# Altium PCB STM32F103.PcbDoc (part 4 of 5)
Units mil, origin at the board's own origin, x right, y up, seen from the top; angles counter-clockwise.
Board outline 3951 x 3526 mil, 2 copper layers (Top Layer, Bottom Layer); 148 components, 169 nets, 748 pads, 448 vias.
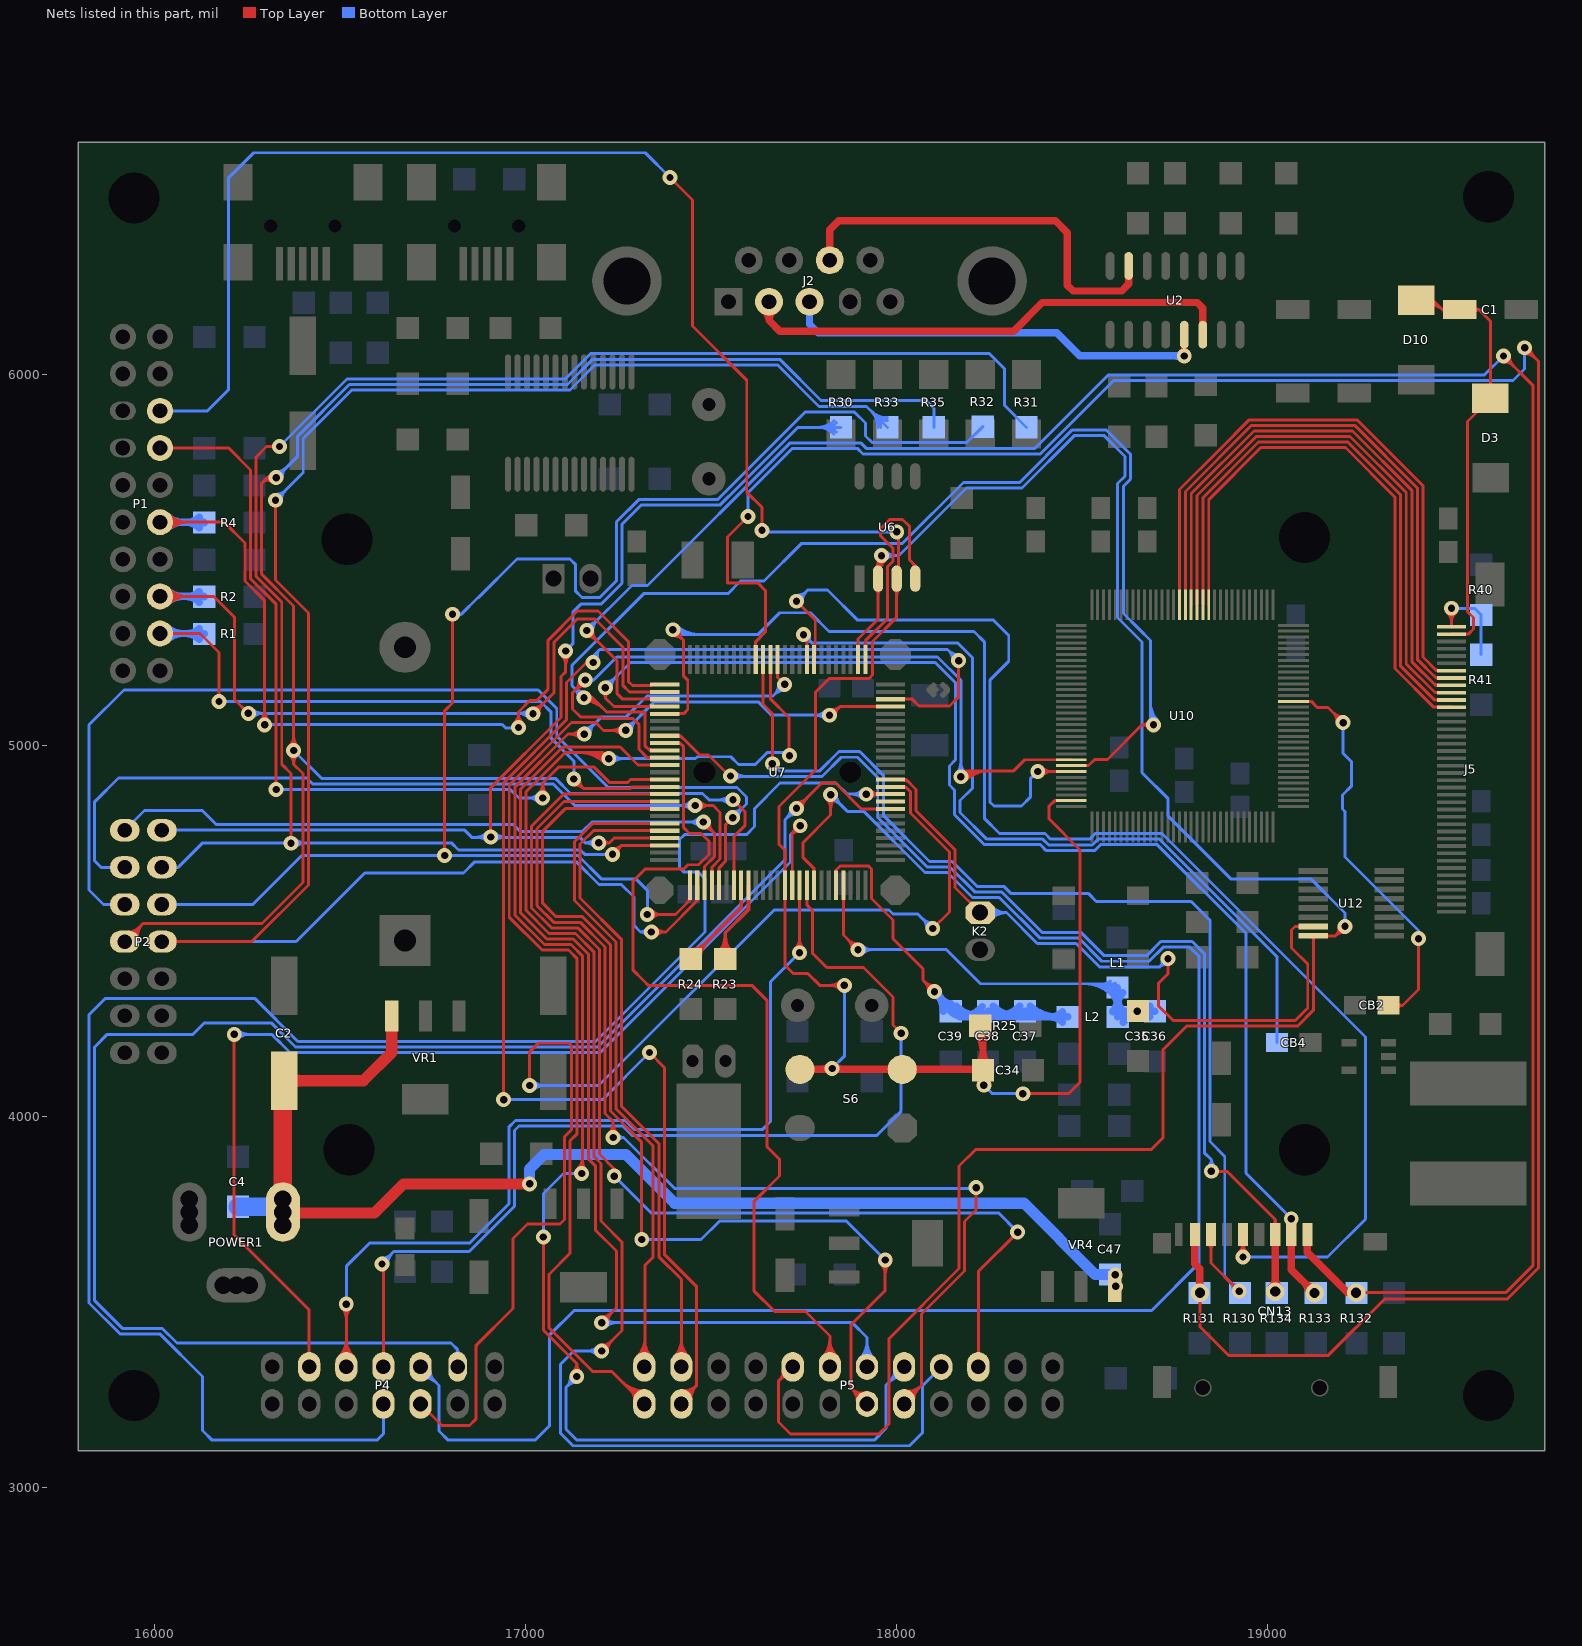
[diagram p4: the nets of this part, all layers, seen from the top]

## Via types
v1: diameter 40, hole 19.68, Top Layer to Bottom Layer, 402 vias
v2: diameter 35, hole 19.68, Top Layer to Bottom Layer, 21 vias
v3: diameter 50, hole 27.56, Top Layer to Bottom Layer, 19 vias
v4: diameter 40, hole 20, Top Layer to Bottom Layer, 6 vias

## Nets (pads, with @x,y where several pads share a name; then routed paths per layer and width w, separated by ;. In a path a pad name is that pad's centre, name@x,y a point inside that pad or via, vN(x,y) a via of type N, cw(c..) or ccw(c..) an arc to the next point about the centre after c; other vN are vias at no path point) (continued)
PA14: P1.9 R4.1 U7.76 | length 2912
  Top Layer w8: P1.9@16015,5602 16188,5602 16244,5546 16244,5443.38 16297,5390.38 v1(16297,5056) ; P1.9@16025.61,5591.39 cw(c16051.21,5565.79) 16051.21,5602 cw(c16051.21,5638.21) P1.9@16025.61,5612.61 ; P1.9@16031.26,5585.74 cw(c16070.53,5546.47) 16070.53,5602 cw(c16070.53,5657.53) P1.9@16031.26,5618.26 ; P1.9@16036.92,5580.08 cw(c16089.84,5527.16) 16089.84,5602 cw(c16089.84,5676.84) P1.9@16036.92,5623.92 ; v1@16285.69,5067.31 ccw(c16258.37,5094.63) 16297,5094.63 ccw(c16335.63,5094.63) v1@16308.31,5067.31 ; v1@16969.69,5060.31 ccw(c16942.37,5087.63) 16981,5087.63 ccw(c17019.63,5087.63) v1@16992.31,5060.31 ; v1(16981,5049) 16981,5090.84 17012.16,5122 17031,5122 17061,5152 17061,5284.21 17139.52,5362.73 17195,5362.73 17277,5280.73 17277,5173 17288,5162 17339,5162 17339,5164.35 U7.76@17375.09,5164.35 ; 17331.91,5162 ccw(c17331.91,5173.66) U7.76@17340.16,5165.41
  Bottom Layer w8: v1(16297,5056) 16298,5057 16937.04,5057 16946.04,5048 16982,5048 v1(16981,5049)
  Bottom Layer w20: P1.9@16015,5602 16133.5,5602 R4.1@16134.5,5601 ; P1.9@16032.68,5584.32 cw(c16075.36,5541.64) 16075.36,5602 cw(c16075.36,5662.36) P1.9@16032.68,5619.68 ; 16083.8,5602 cw(c16083.8,5550.3) R4.1@16120.36,5586.86 ; 16088.63,5602 ccw(c16088.63,5646.87) R4.1@16120.36,5615.14
PA15: P1.5 R2.1 U7.77 | length 2700.3
  Top Layer w8: P1.5@16015,5402 16160,5402 16216,5346 16216,5124 v1(16253,5087) ; P1.5@16025.61,5391.39 cw(c16051.21,5365.79) 16051.21,5402 cw(c16051.21,5438.21) P1.5@16025.61,5412.61 ; P1.5@16031.26,5385.74 cw(c16070.53,5346.47) 16070.53,5402 cw(c16070.53,5457.53) P1.5@16031.26,5418.26 ; P1.5@16036.92,5380.08 cw(c16089.84,5327.16) 16089.84,5402 cw(c16089.84,5476.84) P1.5@16036.92,5423.92 ; v1(17020,5086) 17077,5143 17077,5279 17139,5341 17187,5341 17262,5266 17262,5162.67 17280,5144.67 U7.77@17375.09,5144.67 ; v1@17020,5102 ccw(c17020,5140.63) 17047.31,5113.31 ccw(c17074.63,5086) v1@17036,5086
  Bottom Layer w8: v1(16253,5087) 17019,5087 v1(17020,5086) ; v1@16264.31,5075.69 cw(c16291.63,5048.37) 16291.63,5087 cw(c16291.63,5125.63) v1@16264.31,5098.31 ; 16978.96,5087 cw(c16978.96,5044.96) v1@17008.69,5074.69 ; 16983.79,5087 ccw(c16983.79,5122.21) v1@17008.69,5097.31 ; 16998.27,5087 cw(c16998.27,5064.27) v1@17014.34,5080.34
  Bottom Layer w20: P1.5@16015,5402 16133.5,5402 R2.1@16134.5,5401 ; P1.5@16032.68,5384.32 cw(c16075.36,5341.64) 16075.36,5402 cw(c16075.36,5462.36) P1.5@16032.68,5419.68 ; 16083.8,5402 cw(c16083.8,5350.3) R2.1@16120.36,5386.86 ; 16088.63,5402 ccw(c16088.63,5446.87) R2.1@16120.36,5415.14
PB0: P4.7 U7.35 | length 4835.9
  Top Layer w8: v1(17917.92,4869.08) U7.35@17983.35,4869.08 ; v1@17929.24,4857.76 cw(c17956.55,4830.45) 17956.55,4869.08 cw(c17956.55,4907.71) v1@17929.24,4880.39
  Bottom Layer w8: P4.7@16617,3226 16617,3146 16599.5,3128.5 16155.71,3128.5 16129.34,3154.88 16129.34,3300.12 16014.46,3415 15907.21,3415 15824,3498.21 15824,4275 15868,4319 16270.21,4319 16386.21,4203 17188.51,4203 17483.25,4497.75 17483.25,4640.75 17464,4660 17426,4660 17415,4671 17415,4747 17428,4760 17595,4760 17617,4782 17617,4830.16 17685.84,4899 17836.63,4899 17866.55,4869.08 v1(17917.92,4869.08) ; v1@17906.61,4857.76 ccw(c17879.29,4830.45) 17879.29,4869.08 ccw(c17879.29,4907.71) v1@17906.61,4880.39
PB1: P4.9 U7.36 | length 3491.3
  Top Layer w8: P4.9@16714,3223 P4.9@16717,3226 16775,3168 16849,3168 16866,3185 16866,3380 16867.5,3381.5 ; 16866,3383 16966,3483 16966,3672 17005,3711 17093,3711 17105,3723 17105,3946.21 17124,3965.21 17124,4192 17118,4198 17034,4198 17011,4175 v1(17011,4084) ; U7.36@17983.35,4888.76 18024.09,4888.76 18037,4875.86 18037,4818.33 18142,4713.33 18142,4552 v1(18097,4507) ; U7.36@18017.77,4887.37 cw(c18021.09,4878.89) 18027.53,4885.33
  Bottom Layer w8: v1(17011,4084) 17196.79,4084 17669.79,4557 17979,4557 17990,4546 18057,4546 v1@18086,4517 ; v1@17022.31,4072.69 cw(c17049.63,4045.37) 17049.63,4084 cw(c17049.63,4122.63) v1@17022.31,4095.31 ; 18067.98,4535.02 ccw(c18097,4564.04) v1@18097,4523 ; 18070.39,4532.61 cw(c18044.79,4507) v1@18081,4507 ; 18081.64,4521.36 ccw(c18097,4536.73) v1@18097,4515
PB2: K2.1 U7.37 U12.15 | length 2169.5
  Top Layer w8: U7.37@17983.35,4908.45 18025.62,4908.45 18052,4882.07 18052,4824.54 18157,4719.54 18157,4618 K2.1@18225,4550 ; U7.37@18017.22,4906.95 cw(c18017.22,4883.05) 18034.12,4899.95 ; U7.37@18017.72,4907.03 cw(c18021.55,4895.97) 18029.82,4904.25 ; v1(18731,4426) 18731,4385 18705,4359 18705,4299 18745,4259 18848,4259 19073.79,4259 19107.64,4292.85 19107.64,4411.36 19064,4455 19064,4503.5 19073,4512.5 U12.15@19122.64,4512.5 ; U12.15@19088.4,4509.76 ccw(c19081.79,4503.15) 19081.79,4512.5 ccw(c19081.79,4521.85) U12.15@19088.4,4515.24
  Bottom Layer w8: K2.1@18225,4550 18296,4550 ; K2.1@18247.99,4537.54 cw(c18277.23,4509.46) 18277.23,4550 cw(c18277.23,4590.54) K2.1@18247.99,4562.46 ; K2.1@18253.76,4532 cw(c18296,4491.45) 18296,4550 ; K2.1@18253.76,4568 ccw(c18296,4608.55) 18296,4550 ; v1@18715.22,4423.38 cw(c18693.27,4419.73) 18709,4404 ; v1@18728.38,4410.22 ccw(c18724.73,4388.27) 18709,4404 ; v1(18731,4426) 18709,4404 ; 18296,4550 18379,4467 18483.56,4467 18546.56,4404 18709,4404
PB3: P1.13 U7.89 | length 2415.8
  Top Layer w8: P1.13@16015,5802 16200,5802 16259,5743 16259,5449.59 16328,5380.59 v1(16328,4882) ; v1@17034.69,4870.31 ccw(c17007.37,4897.63) 17046,4897.63 ccw(c17084.63,4897.63) v1@17057.31,4870.31 ; v1@17047,4859 v1(17046,4859) 17046,4899.2 17088.8,4942 17185,4942 17227,4900 17274.55,4900 17283,4908.45 U7.89@17375.09,4908.45
  Bottom Layer w8: v1(16328,4882) 16959,4882 16982,4859 v1(17046,4859) ; v1@17034.69,4847.69 ccw(c17007.37,4820.37) 17007.37,4859 ccw(c17007.37,4897.63) v1@17034.69,4870.31
PB4: P1.3 R1.1 U7.90 | length 2027
  Top Layer w8: P1.3@16015,5302 16123,5302 16174.21,5250.79 v1(16174.21,5118.79) ; v1(17130,4910) 17155.51,4884.49 ; v1@17130.79,4894.02 cw(c17132.4,4861.38) 17155.51,4884.49 ; v1@17145.98,4909.21 ccw(c17178.62,4907.6) 17155.51,4884.49 ; U7.90@17375.09,4888.76 17286.85,4888.76 17282.57,4884.49 17155.51,4884.49
  Bottom Layer w8: v1(16174.21,5118.79) 17040.21,5118.79 17069,5090 17069,5019.57 17130,4958.57 v1(17130,4910)
  Bottom Layer w20: P1.3@16015,5302 16133.5,5302 R1.1@16134.5,5301 ; P1.3@16032.68,5284.32 cw(c16075.36,5241.64) 16075.36,5302 cw(c16075.36,5362.36) P1.3@16032.68,5319.68 ; 16083.8,5302 cw(c16083.8,5250.3) R1.1@16120.36,5286.86 ; 16088.63,5302 ccw(c16088.63,5346.87) R1.1@16120.36,5315.14
PB5: P5.20 U7.91 | length 3028.3
  Top Layer w8: v1(17239,3840) 17239,3859.43 17199,3899.43 17199,4450.85 17140.85,4509 17069.57,4509 17016,4562.57 17016,4783 17102.08,4869.08 U7.91@17375.09,4869.08 ; P5.20@18220,3326 18220,3583 v1(18326,3689)
  Bottom Layer w8: v1(17239,3840) 17338,3741 18274,3741 v1(18326,3689)
PB6: P5.15 U7.92 | length 3294.1
  Top Layer w8: v1@17224.69,3955.31 ccw(c17197.37,3982.63) 17236,3982.63 ccw(c17274.63,3982.63) v1@17247.31,3955.31 ; v1(17236,3944) 17236,3987 17214,4009 17214,4457.07 17147.07,4524 17075.79,4524 17031,4568.79 17031,4776.79 17103.61,4849.39 U7.92@17375.09,4849.39 ; P5.15@18020,3226 18020,3229 18067,3276 ; P5.15@18021.46,3245.89 ccw(c18025.42,3272.61) 18044.51,3253.51 ; P5.15@18022.63,3253.81 ccw(c18028.31,3292.19) 18055.75,3264.75 ; P5.15@18023.81,3261.72 ccw(c18031.21,3311.78) 18067,3276 ; P5.15@18038,3236 cw(c18064.56,3236) 18045.78,3254.78 ; P5.15@18046,3236 cw(c18091.87,3236) 18059.44,3268.44 ; v1(18214,3809) 18214,3749 18183,3718 18183,3584.57 18067,3468.57 18067,3276
  Bottom Layer w8: v1(17236,3944) 17264,3944 ; v1@17249.78,3935.88 cw(c17264,3927.5) 17264,3944 ; v1@17249.78,3952.12 ccw(c17264,3960.5) 17264,3944 ; v1(18214,3809) 18214,3807 17401,3807 17264,3944
PB7: P5.13 U7.93 | length 2961.1
  Top Layer w8: v1(17313,3669) 17313,3931.21 17229,4015.21 17229,4463.28 17153.28,4539 17082,4539 17046,4575 17046,4769 17107,4830 17374.79,4830 U7.93@17375.09,4829.71 ; 17889.79,3256.21 ccw(c17909.88,3276.3) P5.13@17916.08,3248.57 ; 17893.03,3252.97 cw(c17871.38,3231.32) P5.13@17902,3231.12 ; P5.13@17894,3231.17 ccw(c17844.5,3231.49) 17879.5,3266.5 ccw(c17906.13,3293.12) P5.13@17914.33,3256.38 ; P5.13@17920,3226 17877,3269 17877,3439.79 17969,3531.79 v1(17969,3614) ; v1@17957.69,3602.69 cw(c17930.37,3575.37) 17969,3575.37 cw(c18007.63,3575.37) v1@17980.31,3602.69
  Bottom Layer w8: v1(17313,3669) 17473,3669 17522.5,3718.5 17864.5,3718.5 v1(17969,3614)
PB8: P5.2 U7.95 | length 1943.1
  Top Layer w8: P5.2@17301.62,3354.38 ccw(c17252.4,3403.6) 17322,3403.6 ; P5.2@17307.27,3348.73 ccw(c17271.72,3384.28) 17322,3384.28 ; P5.2@17320,3326 17322,3328 17322,3600 17344,3622 17344,3921.43 17244,4021.43 17244,4471 17132,4583 17132,4741 17181.34,4790.34 U7.95@17375.09,4790.34 ; 17322,3374.63 ccw(c17358.63,3374.63) P5.2@17332.73,3348.73 ; 17322,3393.94 ccw(c17377.94,3393.94) P5.2@17338.38,3354.38
PB9: P5.4 U7.96 | length 1931.7
  Top Layer w8: U7.96@17375.09,4770.65 17182.87,4770.65 17147,4734.79 17147,4589.21 17259,4477.21 17259,4027.64 17359,3927.64 17359,3623 17420,3562 P5.4@17420,3326 ; P5.4@17401.62,3354.38 ccw(c17357.23,3398.77) 17420,3398.77 ccw(c17482.77,3398.77) P5.4@17438.38,3354.38 ; P5.4@17407.27,3348.73 ccw(c17376.54,3379.46) 17420,3379.46 ccw(c17463.46,3379.46) P5.4@17432.73,3348.73
PB10: P5.1 U7.47 | length 3553.4
  Top Layer w8: 17258.54,3287.46 ccw(c17320,3348.91) P5.1@17320,3262 ; v1@17258.69,5029.69 ccw(c17231.37,5002.37) 17231.37,5041 ccw(c17231.37,5079.63) v1@17258.69,5052.31 ; v1(17270,5041) 17210,5041 17189,5062 17123.94,5062 16956,4894.06 16956,4537.72 17044.72,4449 17116,4449 17139,4426 17139,3954.21 17120,3935.21 17120,3632 17063,3575 17063,3431.21 17180.11,3314.11 17231.89,3314.11 P5.1@17320,3226 ; 17272.2,3273.8 ccw(c17320,3321.6) P5.1@17320,3254 ; 17282.69,3263.31 cw(c17255.37,3236) P5.1@17294,3236 ; 17285.86,3260.14 ccw(c17320,3294.28) P5.1@17320,3246 ; v1(17819,5082) 17824,5082 17847.3,5105.3 ; v1@17820.57,5089.84 ccw(c17824.09,5107.38) 17836.73,5094.73 ; v1@17822.14,5097.69 ccw(c17827.61,5124.98) 17847.3,5105.3 ; v1@17835,5082 cw(c17861.56,5082) 17842.78,5100.78 ; U7.47@17983.35,5105.3 17847.3,5105.3
  Bottom Layer w8: v1(17270,5041) 17347,5118 17627.21,5118 17663.21,5082 v1(17819,5082) ; v1@17270,5057 ccw(c17270,5095.63) 17297.31,5068.31 ccw(c17324.63,5041) v1@17286,5041 ; v1@17807.69,5070.69 ccw(c17780.37,5043.37) 17780.37,5082 ccw(c17780.37,5120.63) v1@17807.69,5093.31
PB11: P5.3 U7.48 | length 4355.6
  Top Layer w8: v1(16941,4046) 16941,4900.27 17110.2,5069.47 17110.2,5170.2 17164,5224 v1(17182,5224) ; v1(17334,4173) 17374,4133 17374,3629.21 17461,3542.21 17461,3276 ; P5.3@17420,3226 17420,3235 17461,3276 ; P5.3@17421.57,3253.93 ccw(c17424.57,3288.17) 17448.87,3263.87 ; P5.3@17422.27,3261.9 ccw(c17426.52,3310.48) 17461,3276 ; P5.3@17437.98,3236.83 cw(c17472.92,3238.45) 17448.19,3263.19 ; P5.3@17445.97,3237.2 cw(c17497.41,3239.59) 17461,3276 ; U7.48@17983.35,5124.98 18042,5124.98 18059.98,5107 18142,5107 18167,5132 18167,5164 v1(18167,5229)
  Bottom Layer w8: v1@16943,4044 v1(16941,4046) 17207,4046 v1(17334,4173) ; 17184.87,5243.87 ccw(c17196.72,5232.02) v1(17182,5224) 17182,5241 17200,5259 ; v1@17189.03,5227.83 cw(c17206.52,5237.35) 17192.43,5251.43 ; v1@17196.05,5231.65 cw(c17216.31,5242.69) 17200,5259 ; v1@18151,5229 ccw(c18112.37,5229) 18139.69,5256.31 ccw(c18167,5283.63) v1@18167,5245 ; v1(18167,5229) 18137,5259 17200,5259
PB12: U6.4 U7.51 | length 666.4
  Top Layer w8: U7.51@17915.44,5232.27 17915.44,5282.44 17975,5342 17975,5482 17990,5497 17990,5532 17955.79,5566.21 17955.79,5584 17981.29,5609.5 18016,5609.5 18035,5590.5 18035,5500 18050,5485 U6.4@18050,5450 ; 18040.13,5494.87 cw(c18020.16,5474.91) U6.4@18048.23,5471.84
PB13: P5.10 U6.2 U7.52 U12.16 | length 5996.3
  Top Layer w8: 17682.69,3288.69 ccw(c17655.37,3316) P5.10@17694,3316 ; 17685.81,3291.81 cw(c17705.97,3271.65) P5.10@17714.57,3298.84 ; P5.10@17720,3326 17681.5,3287.5 17681.5,3177.5 17714,3145 17952,3145 17979,3172 17979,3401.79 18168,3590.79 18168,3867 18213,3912 18686,3912 18717,3943 18717,4180 18781,4244 19080,4244 19122.64,4286.64 U12.16@19122.64,4487.5 19182.5,4487.5 ; U7.52@17895.76,5232.27 17895.76,5287.07 17950,5341.31 U6.2@17950,5450 17950,5503 v1(17959,5512) ccw(c17980.73,5490.27) 17950,5490.27 ; U6.2@17943.08,5421.43 cw(c17926.39,5404.73) 17950,5404.73 cw(c17973.61,5404.73) U6.2@17956.92,5421.43 ; U6.2@17943.08,5478.57 ccw(c17926.39,5495.26) 17950,5495.26 ccw(c17973.61,5495.26) U6.2@17956.92,5478.57 ; U6.2@17950,5451.64 cw(c18019.36,5451.64) v1@17970.31,5500.69 ; U6.2@17950,5470.96 cw(c18000.04,5470.96) v1@17964.66,5506.34 ; U12.16@19119.9,4484.76 cw(c19113.29,4478.15) 19122.64,4478.15 cw(c19131.99,4478.15) U12.16@19125.38,4484.76 ; U12.16@19156.87,4484.76 cw(c19163.49,4478.15) 19163.49,4487.5 cw(c19163.49,4496.85) U12.16@19156.87,4490.24 ; v1@19192.02,4512.2 cw(c19159.42,4510.58) 19182.5,4487.5 ; v1@19207.2,4497.02 ccw(c19205.58,4464.42) 19182.5,4487.5 ; v1(19208,4513) 19182.5,4487.5
  Bottom Layer w8: v1(17959,5512) 18006,5512 18188,5694 18337.53,5694 18479.53,5836 18558,5836 18615,5779 18615,5726 18595,5706 18595,5345.07 18661,5279.07 18661,4927.05 18731.42,4856.63 18731.42,4809.86 18901.28,4640 19116.79,4640 19208,4548.79 v1(19208,4513) ; v1@17970.31,5500.69 cw(c17997.63,5473.37) 17997.63,5512 cw(c17997.63,5550.63) v1@17970.31,5523.31
PC0: P4.4 U7.15 | length 3091.1
  Top Layer w8: v1(16215,4222) 16215,3681 16417,3479 P4.4@16417,3326 ; U7.15@17718.59,4624 17718.59,4762.59 ; v1@17724.28,4781.03 cw(c17703.99,4777.19) 17718.59,4762.59 ; v1@17737.03,4768.28 ccw(c17733.19,4747.99) 17718.59,4762.59 ; v1(17740,4784) 17718.59,4762.59
  Bottom Layer w8: v1(16215,4222) 16316,4222 16365,4173 17200.93,4173 17714,4686.07 17714,4760 17738,4784 v1(17740,4784) ; v1@16226.31,4210.69 cw(c16253.63,4183.37) 16253.63,4222 cw(c16253.63,4260.63) v1@16226.31,4233.31
PC1: P4.6 U7.16 | length 2674.9
  Top Layer w8: P4.6@16498.62,3354.38 ccw(c16454.23,3398.77) 16517,3398.77 ccw(c16579.77,3398.77) P4.6@16535.38,3354.38 ; P4.6@16504.27,3348.73 ccw(c16473.54,3379.46) 16517,3379.46 ccw(c16560.46,3379.46) P4.6@16529.73,3348.73 ; v1@16505.69,3483.69 cw(c16478.37,3456.37) 16517,3456.37 cw(c16555.63,3456.37) v1@16528.31,3483.69 ; P4.6@16517,3326 v1(16517,3495) ; v1@17726.96,4453.04 ccw(c17699.65,4480.35) 17738.28,4480.35 ccw(c17776.9,4480.35) v1@17749.59,4453.04 ; v1(17738.28,4441.72) U7.16@17738.28,4624
  Bottom Layer w8: v1(16517,3495) 16517,3597 16580,3660 16849.79,3660 16955,3765.21 16955,3972 16973,3990 17268.21,3990 17293.21,3965 17637.79,3965 17660,3987.21 17660,4363.45 v1(17738.28,4441.72)
PC2: P4.8 U7.17 | length 2839.4
  Top Layer w8: v1(16613,3603) 16617,3599 P4.8@16617,3326 ; U7.17@17757.96,4624 17757.96,4571 17773.46,4555.5 17773.46,4440.33 17811.79,4402 17910.59,4402 17990,4322.59 17990,4247 v1(18012,4225)
  Bottom Layer w8: v1@16613,3605 16645,3637 16848,3637 16970,3759 16970,3963 16982,3975 17262,3975 17287,3950 17947,3950 18012,4015 v1(18012,4225) ; v1@16613,3619 ccw(c16613,3652.8) 16636.9,3628.9 ; v1@16621,3603 cw(c16645.14,3603) 16628.07,3620.07 ; v1@16629,3603 cw(c16672.46,3603) 16641.73,3633.73
PC3: P4.10 U7.18 | length 5139.7
  Top Layer w8: U7.18@17777.65,4624 17777.65,4668.35 17748,4698 17748,4739 17822,4813 v1(17822,4868) ; v1@17810.69,4856.69 cw(c17783.37,4829.37) 17822,4829.37 cw(c17860.63,4829.37) v1@17833.31,4856.69
  Bottom Layer w8: P4.10@16717,3326 16767,3276 16767,3153 16791.5,3128.5 17025.5,3128.5 17064,3167 17064,3411 17131,3478 18687,3478 18814,3605 18814,4433 18790,4457 18718,4457 18680,4419 18552.77,4419 18489.77,4482 18385.21,4482 18276.21,4591 18204,4591 18137,4658 18076,4658 17910.92,4823.08 17866.92,4823.08 v1(17822,4868) ; P4.10@16717.89,3306.04 cw(c16721.25,3268.64) 16747.81,3295.19 ; P4.10@16718.61,3298.07 cw(c16723.25,3246.44) 16759.9,3283.1 ; P4.10@16743,3316 ccw(c16781.63,3316) 16754.31,3288.69 ; v1@17822,4852 cw(c17822,4813.37) 17849.31,4840.69 cw(c17876.63,4868) v1@17838,4868
PC4: P4.12 U7.33 | length 4497.8
  Top Layer w8: v1(17730,4831) 17798,4899 17834.84,4899 17904.13,4829.71 U7.33@17983.35,4829.71 ; v1@17730,4847 ccw(c17730,4885.63) 17757.31,4858.31 ccw(c17784.63,4831) v1@17746,4831
  Bottom Layer w8: P4.12@16809.21,3360.5 ccw(c16804.62,3372) 16817,3372 ; P4.12@16817,3326 16817,3372 ; P4.12@16824.79,3360.5 cw(c16829.38,3372) 16817,3372 ; v1@17714,4831 cw(c17675.37,4831) 17702.69,4803.69 cw(c17730,4776.37) v1@17730,4815 ; v1(17730,4831) 17699,4800 17699,4692.28 17194.72,4188 16380,4188 16315,4253 16135,4253 16104,4222 15873,4222 15839,4188 15839,3504.43 15913.43,3430 16020.67,3430 16060.67,3390 16799,3390 16817,3372
PC5: U7.34
PC6: P5.16 U7.63 | length 4455.8
  Top Layer w8: v1(17048,3676) 17048,3425 17138,3335 ; v1@17127.53,3312.1 ccw(c17107.72,3335) 17138,3335 ; v1(17138,3300) 17138,3335 ; v1@17139.69,3858.31 ccw(c17105.13,3892.87) 17154,3892.87 ; v1@17145.34,3852.66 ccw(c17124.44,3873.56) 17154,3873.56 ; v1@17146.69,5019.69 ccw(c17119.37,4992.37) 17119.37,5031 ccw(c17119.37,5069.63) v1@17146.69,5042.31 ; v1@17148.47,3312.1 cw(c17168.28,3335) 17138,3335 ; v1@17151,3836 v1(17151,3847) 17154,3850 17154,4432.21 17122.21,4464 17050.93,4464 16971,4543.93 16971,4887.84 17114.16,5031 v1(17158,5031) ; 17154,3878.38 ccw(c17182.38,3878.38) v1@17162.31,3858.31 ; U7.63@17679.22,5232.27 17679.22,5183.78 v1(17698,5165)
  Bottom Layer w8: v1(17048,3676) 17048,3793 17102,3847 v1(17151,3847) ; v1@17122,3300 cw(c17083.37,3300) 17110.69,3272.69 cw(c17138,3245.37) v1@17138,3284 ; v1(17138,3300) 17109,3271 17109,3158 17138.5,3128.5 17939.5,3128.5 17971,3160 17971,3277 P5.16@18020,3326 ; v1(17158,5031) 17203.69,5076.69 17269.69,5076.69 17327,5134 17667,5134 v1(17698,5165) ; v1@17158,5047 ccw(c17158,5085.63) 17185.31,5058.31 ccw(c17212.63,5031) v1@17174,5031 ; v1@17682,5165 cw(c17643.37,5165) 17670.69,5137.69 cw(c17698,5110.37) v1@17698,5149 ; 17977.86,3283.86 cw(c18012.91,3248.8) P5.16@18018.11,3298.1 ; 17982.69,3288.69 ccw(c17955.37,3316) P5.16@17994,3316 ; 17989.71,3295.71 cw(c18015.17,3270.25) P5.16@18018.95,3306.06
PC7: P5.18 U7.64 | length 4646.9
  Top Layer w8: 17146.75,4981 cw(c17146.75,4887.75) v1@17212.69,4953.69 ; 17166.06,4981 cw(c17166.06,4907.06) v1@17218.34,4959.34 ; 17185.37,4981 cw(c17185.37,4926.37) v1(17224,4965) 17208,4981 17106.58,4981 17001,4875.42 17001,4556.36 17063.36,4494 17134.64,4494 17184,4444.64 17184,3893.21 17203,3874.21 17203,3719 17260,3662 17260,3424 v1(17205,3369) ; 17204.69,4981 cw(c17204.69,4945.69) v1@17229.66,4970.66 ; v1@17205,3385 ccw(c17205,3423.63) 17232.31,3396.31 ccw(c17259.63,3369) v1@17221,3369 ; U7.64@17659.54,5232.27 17659.54,5126 17710,5075.54 17710,4974 v1(17711,4973)
  Bottom Layer w8: v1@17193.69,3357.69 ccw(c17166.37,3330.37) 17166.37,3369 ccw(c17166.37,3407.63) v1@17193.69,3380.31 ; v1(17205,3369) 17130,3369 17094,3333 17094,3147 17127.5,3113.5 18034.5,3113.5 18070,3149 18070,3276 P5.18@18120,3326 ; v1(17224,4965) 17458,4965 17463,4970 17553,4970 17574,4949 17619.16,4949 17652.16,4982 17702,4982 v1(17711,4973) v1@17710,4972 ; v1@17235.31,4953.69 cw(c17262.63,4926.37) 17262.63,4965 cw(c17262.63,5003.63) v1@17235.31,4976.31
PC8: CN13.7 R130.2 U7.65 | length 3065.7
  Top Layer w8: U7.65@17639.85,5232.27 17639.85,5112 17665,5086.85 v1(17665,4951) ; CN13.7@18839.86,3658.06 cw(c18823.16,3641.37) 18846.77,3641.37 cw(c18870.38,3641.37) CN13.7@18853.69,3658.06 ; CN13.7@18846.77,3682.69 18846.77,3606.23 v1(18923,3530)
  Bottom Layer w8: v1(17665,4951) 17684,4932 17792.79,4932 17844.79,4984 17900.21,4984 17964,4920.21 17964,4812.43 18088.43,4688 18149.43,4688 18216.43,4621 18288.64,4621 18307.64,4602 18516,4602 18538,4580 18793.43,4580 18844,4529.43 18844,3933 18884,3893 18884,3569 v1(18923,3530) ; R130.2@18907,3530 ccw(c18868.37,3530) 18895.69,3557.31 ccw(c18923,3584.63) R130.2@18923,3546
PC9: CN13.8 R131.2 U7.66 | length 6779.5
  Top Layer w8: v1(17599.32,5617.16) 17544,5561.84 17544,5438.58 17625.42,5438.58 17646.17,5417.83 17646.17,5306 17620.17,5280 U7.66@17620.17,5232.27 ; v3(18817,3526) 18817,3434 18894,3357 19163,3357 19315,3509 19645.21,3509 19730,3593.79 19730,6035 19693,6072 v1(19692,6072) ; v1@19692,6056 cw(c19692,6014.96) 19721.02,6043.98 ; v1@19692,6064 cw(c19692,6042.27) 19707.36,6057.64 ; v1@19708,6072 ccw(c19744.21,6072) 19718.61,6046.39
  Top Layer w20: CN13.8@18803.46,3682.69 18803.46,3603.54 18817,3590 v3(18817,3526)
  Bottom Layer w8: v1(17599.32,5617.16) 17599.32,5681.09 17719.22,5801 17894,5801 17909,5786 18387.1,5786 18585.1,5984 19611,5984 ; R131.2@18816,3525 18817,3525 v3(18817,3526) ; 19646,5984 19611,5984 ; v1(19692,6072) 19692,6015 19661,5984 19611,5984
PC10: CN13.1 R132.2 U7.78 | length 6697.5
  Top Layer w8: v1@17165,5294 cw(c17165,5255.37) 17192.31,5282.69 cw(c17219.63,5310) v1@17181,5310 ; v1(17165,5310) 17247,5228 17247,5139.83 17261.85,5124.98 U7.78@17375.09,5124.98 ; v3(19238,3526) 19641,3526 19715,3600 19715,5970 v1(19635,6050) ; v1@19635,6034 cw(c19635,5995.37) 19662.31,6022.69 cw(c19689.63,6050) v1@19651,6050 ; 19106.61,3641.37 cw(c19130.22,3641.37) 19113.53,3658.06 ccw(c19130.22,3641.37) 19106.61,3641.37 ; 19106.61,3641.37 ccw(c19083,3641.37) 19099.7,3658.06 cw(c19083,3641.37) 19106.61,3641.37 ; 19106.61,3634.39 CN13.1@19106.61,3682.69 19106.61,3634.39
  Top Layer w20: CN13.1@19106.61,3682.69 19106.61,3634.39 19215,3526 v3(19238,3526)
  Bottom Layer w8: v1(17165,5310) 17286.5,5431.5 17328.51,5431.5 17713.01,5816 17903,5816 17918,5801 18373,5801 18571,5999 19584,5999 v1(19635,6050) ; v1@17165,5326 ccw(c17165,5364.63) 17192.31,5337.31 ccw(c17219.63,5310) v1@17181,5310 ; v3(19238,3526) 19239,3526 R132.2@19239,3525
PC11: CN13.2 R133.2 U7.79 | length 3770.7
  Top Layer w8: v1@17207.01,5142.14 cw(c17199.02,5128.3) 17215,5128.3 ; v1(17215,5156) 17215,5128.3 ; v1@17222.99,5142.14 ccw(c17230.98,5128.3) 17215,5128.3 ; U7.79@17375.09,5105.3 17238,5105.3 17215,5128.3 ; CN13.2@19053.5,3712.13 cw(c19039.62,3693.31) CN13.2@19063,3693.31 ; CN13.2@19056.39,3707.33 ccw(c19040.44,3723.28) v1@19063,3723.28 ; v1@19063,3724.76 ccw(c19087.66,3724.76) CN13.2@19070.22,3707.33 ; v1(19063,3725) CN13.2@19063,3693.31 ; CN13.2@19063.31,3682.69 19063.31,3693 CN13.2@19063,3693.31 ; CN13.2@19072.5,3712.13 ccw(c19086.38,3693.31) CN13.2@19063,3693.31
  Top Layer w20: CN13.2@19063.31,3682.69 19063.31,3587.69 v3(19126,3525) ; v3@19111,3525 ccw(c19074.79,3525) 19100.39,3550.61 ccw(c19126,3576.21) v3@19126,3540
  Bottom Layer w8: v1(17215,5156) 17283,5224 18103.79,5224 18158,5169.79 18158,4961 18142,4945 18142,4894 18155.94,4880.06 18155.94,4813.84 18236.79,4733 18387.21,4733 18403.21,4717 18532.95,4717 18548.95,4733 18702.21,4733 18941,4494.21 18941,3848 19063,3726 v1(19063,3725) ; v1@17215,5172 ccw(c17215,5210.63) 17242.31,5183.31 ccw(c17269.63,5156) v1@17231,5156 ; v3(19126,3525) R133.2@19129,3525
PC12: CN13.5 U7.80 | length 4197.8
  Top Layer w8: U7.80@17375.09,5085.61 17375.47,5086 17426,5086 17437,5097 17437,5176 17426,5187 17426,5283 v1(17397,5312) ; v1@17397,5296 cw(c17397,5257.37) 17424.31,5284.69 cw(c17451.63,5312) v1@17413,5312 ; v1@18921.69,3633.31 ccw(c18893.44,3661.56) CN13.5@18933.39,3661.56 ; CN13.5@18926.47,3658.06 cw(c18909.78,3641.37) 18933.39,3641.37 cw(c18957,3641.37) CN13.5@18940.3,3658.06 ; v1@18927.34,3627.66 ccw(c18912.75,3642.25) 18933.39,3642.25 ; v1@18933.39,3622.39 CN13.5@18933.39,3682.69 ; CN13.5@18933.39,3659.7 ccw(c18970.7,3659.7) v1@18944.31,3633.31
  Bottom Layer w8: v1@17402.66,5317.66 ccw(c17445.28,5360.28) 17445.28,5300 ; v1@17408.31,5323.31 ccw(c17464.6,5379.6) 17464.6,5300 ; 17425.97,5300 cw(c17425.97,5340.97) v1(17397,5312) 17409,5300 17627,5300 17685,5358 17767,5358 17817.3,5307.7 18208,5307.7 18236,5279.7 18236,4804 18277,4763 18399.64,4763 18414.64,4748 18520,4748 18535,4763 18714.64,4763 19263,4214.64 19263,3724 19161,3622 v1(18933,3622)
PC13: P2.7 R35.1 U7.7 | length 5739.3
  Top Layer w8: P2.7@15920,4472 15969,4521 ; P2.7@15930,4498 ccw(c15930,4536.63) 15957.31,4509.31 ; P2.7@15939.82,4473.9 cw(c15968.04,4479.38) 15947.71,4499.71 ; P2.7@15947.67,4475.43 cw(c15985.87,4482.84) 15958.35,4510.35 ; P2.7@15955.52,4476.95 cw(c16003.7,4486.3) 15969,4521 ; 16292,5710 cw(c16304.7,5697.31) v1@16317.02,5710.36 ; 16297.82,5715.82 cw(c16310.35,5703.3) v1@16322.51,5716.18 ; 16303.65,5721.65 cw(c16316.01,5709.29) v1(16328,5722) 16304,5722 ; v1@16313.23,5715.85 ccw(c16304,5712) 16304,5722 ; v1@16313.23,5728.15 cw(c16304,5732) 16304,5722 ; v1@16363.69,4998.31 ccw(c16336.37,5025.63) 16375,5025.63 ccw(c16413.63,5025.63) v1@16386.31,4998.31 ; v1@16364.04,4975.34 cw(c16340.22,4950) 16375,4950 ; v1@16385.96,4975.34 ccw(c16409.78,4950) 16375,4950 ; v1(17559,4854) 17591.62,4821.38 17591.62,4785.62 17561.11,4755.11 U7.7@17561.11,4624 ; 15969,4521 16290.02,4521 16400,4630.98 16400,4925 16375,4950 ; 16304,5722 16289.03,5707.03 16289.03,5461.99 16375,5376.02 v1(16375,4987) 16375,4950
  Bottom Layer w8: v1(16328,5722) 16386,5780 16386,5833.79 16525.21,5973 17113.21,5973 17181.21,6041 17685,6041 17796,5930 18080,5930 18100,5910 R35.1@18100,5857.5 ; v1@16328,5738 ccw(c16328,5776.63) 16355.31,5749.31 ccw(c16382.63,5722) v1@16344,5722 ; v1(16375,4987) 16450,4912 17080,4912 17121,4871 17477,4871 17494,4854 v1(17559,4854) ; v1@17547.69,4842.69 ccw(c17520.37,4815.37) 17520.37,4854 ccw(c17520.37,4892.63) v1@17547.69,4865.31
PC14: R24.2 U7.8 | length 406.9
  Top Layer w10: R24.2@17445,4425 17445,4428 17580.8,4563.8 U7.8@17580.8,4624 ; R24.2@17445,4440 ccw(c17445,4468.97) R24.2@17465.49,4448.49 ; R24.2@17445,4450 ccw(c17445,4503.11) 17482.56,4465.56 ; R24.2@17460,4425 cw(c17503.46,4425) 17472.73,4455.73 ; R24.2@17470,4425 cw(c17537.6,4425) 17489.8,4472.8
PC15: R23.2 U7.9 | length 376.6
  Top Layer w10: R23.2@17520.33,4442.68 ccw(c17477.65,4485.36) 17538,4485.36 ccw(c17598.36,4485.36) R23.2@17555.68,4442.68 ; R23.2@17527.4,4435.61 ccw(c17501.79,4461.21) 17538,4461.21 ccw(c17574.22,4461.21) R23.2@17548.61,4435.61 ; R23.2@17538,4425 17538,4496 17600.48,4558.48 U7.9@17600.48,4624
PD2: CN13.3 R134.2 U7.83 | length 3099.1
  Top Layer w8: U7.83@17375.09,5026.56 17417.53,5026.56 17469.09,4975 17493,4975 v1@17551,4917 ; U7.83@17408.96,5025.06 cw(c17408.96,5000.75) 17426.15,5017.94 ; U7.83@17409.44,5025.14 cw(c17413.33,5013.79) 17421.81,5022.27 ; v1(18848,3853) 18890,3853 19020,3723 ; CN13.3@19013.31,3707.54 ccw(c18998.8,3723) 19020,3723 ; CN13.3@19020,3682.69 19020,3723 ; CN13.3@19026.69,3707.54 cw(c19041.2,3723) 19020,3723
  Top Layer w20: v3@19009.39,3539.61 ccw(c18983.79,3565.21) 19020,3565.21 ccw(c19056.21,3565.21) v3@19030.61,3539.61 ; v3(19020,3529) CN13.3@19020,3682.69
  Bottom Layer w8: v1@17553,4917 17706,4917 17799,4917 17850.66,4968.66 17894.34,4968.66 17949,4914 17949,4881.84 17949,4806.21 18082.21,4673 18143.21,4673 18210.21,4606 18282.43,4606 18391.43,4497 18495.98,4497 18558.98,4434 18673.79,4434 18711.79,4472 18796.21,4472 18829,4439.21 18829,3903 18848,3884 ; v1@17557.66,4923.66 ccw(c17573.73,4939.73) 17573.73,4917 ; v1@17563.31,4906.69 cw(c17588.21,4881.79) 17588.21,4917 ; v1@17563.31,4929.31 ccw(c17593.04,4959.04) 17593.04,4917 ; v1@18838.73,3866.04 ccw(c18825.97,3884) 18848,3884 ; v1(18848,3853) 18848,3884 ; v1@18857.27,3866.04 cw(c18870.03,3884) 18848,3884 ; v3(19020,3529) 19024,3529 R134.2@19024,3525
  other v1: 17552,4918
PD3: P5.12 U7.84 | length 2601.3
  Top Layer w8: U7.84@17375.09,5006.87 17416,5006.87 17426,4996.87 17426,4779 17442,4763 17473,4763 17494,4742 17494,4706.9 17466.1,4679 17437.57,4679 17425.57,4667 17322,4667 17289,4634 17289,4396 17318,4367 17332,4353 17611,4353 17650,4314 17650,3919.57 17684,3885.57 17684,3840.16 17615,3771.16 17615,3531.21 17671.21,3475 17754,3475 17820,3409 P5.12@17820,3326 ; U7.84@17409.5,5005.47 cw(c17412.88,4996.71) 17419.52,5003.35 ; P5.12@17801.62,3354.38 ccw(c17757.23,3398.77) 17820,3398.77 ccw(c17882.77,3398.77) P5.12@17838.38,3354.38 ; P5.12@17807.27,3348.73 ccw(c17776.54,3379.46) 17820,3379.46 ccw(c17863.46,3379.46) P5.12@17832.73,3348.73
PD4: U7.85 U10.121 | length 3731.4
  Top Layer w8: v1@17157.67,5120.94 cw(c17157.67,5046.84) 17210.06,5099.24 ; v1@17157.67,5136.94 cw(c17157.67,5101.47) 17182.75,5126.55 ; v1@17163.31,5123.27 cw(c17174.67,5111.89) 17186.04,5123.26 ; v1@17168.96,5117.61 cw(c17180.33,5106.21) 17191.71,5117.59 ; v1@17172.74,5123.57 cw(c17180.36,5120.85) 17180.36,5128.94 ; v1@17172.74,5134.31 ccw(c17180.36,5137.03) 17180.36,5128.94 ; 17180.38,5128.92 ccw(c17169.01,5117.56) v1(17157.67,5128.94) ; 17196.41,5112.89 ccw(c17157.67,5074.15) v1(17157.67,5128.94) ; 17326.33,4994.86 ccw(c17341.22,5009.74) U7.85@17341.22,4988.69 ; U7.85@17375.09,4987.19 17333.99,4987.19 17321.21,4999.97 17321.21,5088.86 17319.77,5090.3 17219,5090.3 17180.36,5128.94 ; U10.121@18470.79,4946.14 18517.14,4946.14 18533.64,4962.64 18567.85,4962.64 18661.21,5056 ; v1@18678.91,5046.81 ccw(c18661.21,5034.38) 18661.21,5056 ; v1@18678.91,5065.19 cw(c18661.21,5077.62) 18661.21,5056 ; v1@18692,5053 v1(18692,5056) 18661.21,5056 ; v1(17157.67,5128.94) 17180.36,5128.94
  Bottom Layer w8: v1@17141.67,5128.94 ccw(c17103.04,5128.94) 17130.35,5156.25 ccw(c17157.67,5183.57) v1@17157.67,5144.94 ; v1(17157.67,5128.94) 17125.01,5161.6 17125.01,5216.37 17318.17,5409.54 17545.51,5409.54 17579.32,5443.35 17642.35,5443.35 17744,5545 18016,5545 18180,5709 18331.31,5709 18473.31,5851 18564.21,5851 18630,5785.21 18630,5717.79 18611,5698.79 18611,5356 18652,5315 18684,5283 18684,5056 v1(18692,5056) cw(c18711.31,5075.31) 18684,5075.31 cw(c18672.69,5075.31) v1@18680.69,5067.31 ; 18684,5094.63 ccw(c18730.63,5094.63) v1@18697.66,5061.66 ; 18684,5113.94 ccw(c18749.94,5113.94) v1@18703.31,5067.31
PD5: U7.86 U10.120 | length 2418.6
  Top Layer w8: v1@17145,5177 cw(c17106.37,5177) 17133.69,5149.69 cw(c17161,5122.37) v1@17161,5161 ; v1(17161,5177) 17126.67,5142.67 17126.67,5098.98 17148.65,5077 17204,5077 17207.35,5073.65 17288.35,5073.65 17306,5056 17306,4989.5 17328,4967.5 U7.86@17375.09,4967.5 ; v1@18167.34,4921.66 cw(c18192.31,4896.69) 18192.31,4932 ; v1@18178.66,4910.34 cw(c18230.94,4858.06) 18230.94,4932 ; v1@18184.31,4904.69 cw(c18250.25,4838.75) 18250.25,4932 ; 18211.63,4932 ccw(c18211.63,4877.37) v1(18173,4916) 18189,4932 18315.11,4932 18345,4961.89 U10.120@18470.79,4961.89
  Bottom Layer w8: v1(17161,5177) 17183.97,5177 ; v1@17176.01,5171.45 cw(c17183.97,5168.51) 17183.97,5177 ; v1@17176.01,5182.55 ccw(c17183.97,5185.49) 17183.97,5177 ; v1@18161.69,4927.31 ccw(c18134.37,4954.63) 18173,4954.63 ccw(c18211.63,4954.63) v1@18184.31,4927.31 ; v1(18173,4916) 18173,5176 18110,5239 17245.97,5239 17183.97,5177
PD6: P5.14 U7.87 | length 3157.4
  Top Layer w8: v1(17205,3445) 17245,3485 17245,3638 17188,3695 17188,3868 17169,3887 17169,4438.43 17128.43,4479 17057.15,4479 16986,4550.15 16986,4881.63 17100.37,4996 17255,4996 17303.18,4947.82 U7.87@17375.09,4947.82 ; v1@17205,3461 ccw(c17205,3499.63) 17232.31,3472.31 ccw(c17259.63,3445) v1@17221,3445
  Bottom Layer w8: v1(17205,3445) 17880,3445 17920,3405 P5.14@17920,3326 ; v1@17216.31,3433.69 cw(c17243.63,3406.37) 17243.63,3445 cw(c17243.63,3483.63) v1@17216.31,3456.31 ; P5.14@17901.62,3349.38 ccw(c17857.23,3393.77) 17920,3393.77 ccw(c17982.77,3393.77) P5.14@17938.38,3349.38 ; P5.14@17907.27,3343.73 ccw(c17876.54,3374.46) 17920,3374.46 ccw(c17963.46,3374.46) P5.14@17932.73,3343.73
PD11: U7.58 U10.122 | length 1708
  Top Layer w8: v1(17730,5389) 17780.59,5338.41 17780.59,5249.81 17777.65,5246.86 U7.58@17777.65,5232.27 ; U7.58@17776.59,5267.2 ccw(c17766.92,5276.87) 17780.59,5276.87 ; v1(18380,4930.39) U10.122@18470.79,4930.39 ; v1@18391.31,4919.08 cw(c18418.63,4891.77) 18418.63,4930.39 cw(c18418.63,4969.02) v1@18391.31,4941.71
  Bottom Layer w8: v1(17730,5389) 17760,5419 17813.84,5419 17894.88,5337.96 18261.04,5337.96 18302,5297 18302,5227 18251,5176 18251,4848 18262,4837 18336,4837 18360,4861 18360,4910.39 v1(18380,4930.39) ; v1@17730,5405 ccw(c17730,5443.63) 17757.31,5416.31 ccw(c17784.63,5389) v1@17746,5389
PD12: CB4.1 U7.59 | length 2283.7
  Top Layer w8: v1(17749,5299) 17757.96,5290.04 U7.59@17757.96,5232.27
  Bottom Layer w8: v1(17749,5299) 17771,5277 ; v1@17751.62,5283.22 cw(c17755.27,5261.27) 17771,5277 ; v1@17764.78,5296.38 ccw(c17786.73,5292.73) 17771,5277 ; CB4.1@19025,4200 19025,4431.43 18708.43,4748 18542.73,4748 18526.73,4732 18409.43,4732 18393.43,4748 18243,4748 18170.94,4820.06 18170.94,4851.94 18204,4885 18204,5237 18164,5277 17771,5277
PE0: P2.2 R30.1 U7.97 | length 3593.7
  Top Layer w8: v1(16906,4754) 16906,4774 ; v1@16906,4763 16906,4774 ; v1@17096.69,5243.69 cw(c17069.37,5216.37) 17108,5216.37 cw(c17146.63,5216.37) v1@17119.31,5243.69 ; v1(17108,5255) 17108,5199 17095.2,5186.2 17095.2,5075.69 16906,4886.48 16906,4774 ; v1@17189,4729 v1@17198,4738 ; v1(17197,4738) v1@17198,4738 ; v1@17210.54,4729.47 cw(c17226,4719.72) 17226,4738 ; v1@17210.54,4746.53 ccw(c17226,4756.28) 17226,4738 ; U7.97@17375.09,4750.97 17238.97,4750.97 17226,4738 ; v1@17198,4738 17226,4738
  Bottom Layer w8: P2.2@16020,4772 16836,4772 16855,4753 v1@16906,4753 ; 16864.96,4753 ccw(c16864.96,4795.04) v1@16894.69,4765.31 ; 16869.79,4753 cw(c16869.79,4717.79) v1@16894.69,4742.69 ; 16884.27,4753 ccw(c16884.27,4775.73) v1@16900.34,4759.66 ; v1(16906,4754) 16907,4753 17146,4753 17161,4738 ; v1@16911.66,4759.66 ccw(c16927.73,4775.73) 16927.73,4753 ; v1@16917.31,4742.69 cw(c16942.21,4717.79) 16942.21,4753 ; v1@16917.31,4765.31 ccw(c16947.04,4795.04) 16947.04,4753 ; v1(17108,5255) 17127.2,5274.2 17127.2,5359.2 17149,5381 17203.21,5381 17260,5437.79 17260,5596.79 17310.94,5647.73 17523.53,5647.73 17575.49,5699.69 17733.3,5857.5 R30.1@17850,5857.5 ; v1@17185.12,4727.28 ccw(c17161,4705.5) 17161,4738 ; v1@17185.12,4748.72 cw(c17161,4770.5) 17161,4738 ; v1(17197,4738) 17161,4738 ; R30.1@17831.62,5839.12 ccw(c17787.23,5794.73) 17787.23,5857.5 ccw(c17787.23,5920.27) R30.1@17831.62,5875.88 ; R30.1@17837.27,5844.77 ccw(c17806.54,5814.04) 17806.54,5857.5 ccw(c17806.54,5900.96) R30.1@17837.27,5870.23
PE1: P2.4 R31.1 U7.98 | length 4956.2
  Top Layer w8: v1(16337,5806) 16302,5806 16274,5778 16274,5455.8 16343,5386.8 16343,4950 16368,4925 v1(16368,4737) ; v1(17234,4707) 17258.28,4731.28 ; v1@17235.38,4722.94 ccw(c17237.88,4751.69) 17258.28,4731.28 ; v1@17249.94,4708.38 cw(c17278.69,4710.88) 17258.28,4731.28 ; U7.98@17375.09,4731.28 17258.28,4731.28
  Bottom Layer w8: P2.4@16020,4672 16064,4672 16130,4738 16800,4738 16819,4719 17147.21,4719 17159.21,4707 v1(17234,4707) v1@17234,4696 ; v1(16337,5806) 16519,5988 17107,5988 17175,6056 18250,6056 18290,6016 18290,5917.5 R31.1@18350,5857.5 ; v1@16373.66,4731.34 cw(c16389.73,4715.27) 16389.73,4738 ; v1@16379.31,4725.69 cw(c16409.04,4695.96) 16409.04,4738 ; v1@16379.31,4748.31 ccw(c16404.21,4773.21) 16404.21,4738
PE2: P2.6 R32.1 U7.1 | length 4376.7
  Top Layer w8: v1(16782,4704) 16782,5094 16803,5115 v1(16803,5354) ; v1(17328,4545) 17404,4545 17443,4584 U7.1@17443,4624 U7.1@17443,4590 ; v1@17339.31,4533.69 cw(c17366.63,4506.37) 17366.63,4545 cw(c17366.63,4583.63) v1@17339.31,4556.31 ; 17436.1,4577.1 ccw(c17423.08,4590.13) U7.1@17441.5,4590.13
  Bottom Layer w8: P2.6@16020,4572 16265,4572 16397,4704 v1(16782,4704) 17141,4704 17204,4641 17297,4641 17328,4610 v1(17328,4545) ; v1(16803,5354) 16827,5354 ; v1@16817.77,5347.85 cw(c16827,5344) 16827,5354 ; v1@16817.77,5360.15 ccw(c16827,5364) 16827,5354 ; 16872,5399 16827,5354 ; 16872.5,5398.5 16976.87,5502.87 17120,5502.87 17134,5488.87 17134,5417 17152,5399 17200,5399 17245,5444 17245,5603 17304.73,5662.73 17517.31,5662.73 17753.08,5898.5 17886.5,5898.5 17916,5869 17916,5834.5 17934,5816.5 18189,5816.5 R32.1@18232,5859.5
PE3: P2.8 R33.1 U7.2 | length 5528.5
  Top Layer w8: P2.8@16020,4472 16262.23,4472 16415,4624.77 16415,5357.23 16326,5446.23 v1(16326,5661) ; v1(17339,4498) 17378.21,4498 17462.68,4582.47 U7.2@17462.68,4624 ; v1@17350.31,4486.69 cw(c17377.63,4459.37) 17377.63,4498 cw(c17377.63,4536.63) v1@17350.31,4509.31 ; 17454.71,4574.49 ccw(c17439.07,4590.13) U7.2@17461.18,4590.13
  Bottom Layer w8: P2.8@16020,4472 16382,4472 16567,4657 16833,4657 16863,4687 17136.79,4687 17197.79,4626 17258,4626 17292,4592 17292,4516 17310,4498 ; v1(16326,5661) 16401,5736 16401,5827.57 16531.43,5958 17119.43,5958 17187.43,6026 17678.79,6026 17790.79,5914 17918.5,5914 R33.1@17975,5857.5 ; v1@16326,5677 ccw(c16326,5715.63) 16353.31,5688.31 ccw(c16380.63,5661) v1@16342,5661 ; v1@17325.46,4489.47 ccw(c17310,4479.72) 17310,4498 ; v1@17325.46,4506.53 cw(c17310,4516.28) 17310,4498 ; v1(17339,4498) 17310,4498 ; R33.1@17949,5857.5 ccw(c17886.23,5857.5) 17930.62,5901.88 ccw(c17975,5946.27) R33.1@17975,5883.5 ; R33.1@17957,5857.5 ccw(c17913.54,5857.5) 17944.27,5888.23 ccw(c17975,5918.96) R33.1@17975,5875.5
PE4: P2.1 U7.3 | length 1930.1
  Top Layer w8: v1@17479,4778 cw(c17479,4739.37) 17506.31,4766.69 cw(c17533.63,4794) v1@17495,4794 ; v1(17479,4794) 17509,4764 17509,4700.69 17482.37,4674.06 U7.3@17482.37,4624
  Bottom Layer w8: P2.1@15920,4772 15973,4825 16129,4825 16167,4787 16967.79,4787 16986.79,4768 17153,4768 17179,4794 v1(17479,4794) ; v1@17467.69,4782.69 ccw(c17440.37,4755.37) 17440.37,4794 ccw(c17440.37,4832.63) v1@17467.69,4805.31
PE5: P2.3 U7.4 | length 2332.5
  Top Layer w8: v1@17457,4834 v1(17457,4838.47) 17505.53,4838.47 17524,4820 17524,4694.47 17502.05,4672.53 U7.4@17502.05,4624 ; v1@17468.31,4827.15 cw(c17495.63,4799.84) 17495.63,4838.47 cw(c17495.63,4877.1) v1@17468.31,4849.78
  Bottom Layer w8: P2.3@15920,4672 15856,4672 15839,4689 15839,4849 15903,4913 16410,4913 16426,4897 17073.79,4897 17132.32,4838.47 v1(17457,4838.47) v1@17457,4835 ; v1@17445.69,4827.15 ccw(c17418.37,4799.84) 17418.37,4838.47 ccw(c17418.37,4877.1) v1@17445.69,4849.78
PE6: P2.5 U7.5 | length 2858.8
  Top Layer w8: U7.5@17521.74,4624 17521.74,4671 17539,4688.26 17539,4787 v1(17558,4806)
  Bottom Layer w8: P2.5@15920,4572 15863,4572 15824,4611 15824,5056 15918,5150 17034,5150 17084,5100 17084,5025.79 17222.79,4887 17569.84,4887 17594.98,4861.86 17594.98,4842.98 v1(17558,4806) ; v1@17558,4822 ccw(c17558,4860.63) 17585.31,4833.31 ccw(c17612.63,4806) v1@17574,4806
R2_TFT: J5.7 U10.81 | length 1685.1
  Top Layer w8: U10.81@18762.13,5379.21 18762.13,5690.13 18867.5,5795.5 18867.56,5795.5 18950.06,5878 19240.35,5878 19418,5700.35 19418,5238.65 19454.76,5201.89 J5.7@19495,5201.89 ; 19448.9,5207.75 ccw(c19460.63,5219.48) J5.7@19460.63,5202.89
R3_TFT: J5.8 U10.80 | length 1664.8
  Top Layer w8: U10.80@18777.87,5379.21 18777.87,5684.66 18777.93,5684.66 18956.27,5863 19234.13,5863 19403,5694.13 19403,5232.44 19453.23,5182.21 J5.8@19495,5182.21 ; 19446.29,5189.15 ccw(c19460.63,5203.48) J5.8@19460.63,5183.21
R4_TFT: J5.9 U10.79 | length 1644.5
  Top Layer w8: U10.79@18793.62,5379.21 18793.71,5379.3 18793.71,5679.23 18962.48,5848 19227.92,5848 19388,5687.92 19388,5226.22 19451.7,5162.52 J5.9@19495,5162.52 ; 19443.68,5170.54 ccw(c19460.63,5187.49) J5.9@19460.63,5163.52
R5_TFT: J5.10 U10.78 | length 1602.4
  Top Layer w8: U10.78@18809.37,5379.21 18809.37,5673.67 18968.7,5833 19221.71,5833 19373,5681.71 19373,5220.01 19450.17,5142.84 J5.10@19495,5142.84
R6_TFT: J5.11 U10.77 | length 1585.3
  Top Layer w8: U10.77@18825.12,5379.21 18825.12,5668.21 18974.91,5818 19215.49,5818 19358,5675.49 19358,5213.8 19445.61,5126.19 ; J5.11@19495,5123.15 19448.65,5123.15 ; 19445.61,5126.19 19448.65,5126.19 19448.65,5123.15 ; 19445.61,5126.19 19448.65,5123.15
R7_TFT: J5.12 U10.76 | length 1556
  Top Layer w8: U10.76@18840.87,5379.21 18840.87,5662.74 18981.12,5803 19209.28,5803 19343,5669.28 19343,5207.58 19447.12,5103.47 J5.12@19495,5103.47
RESET: C34.2 P1.15 R25.2 S6.2 U6.3 U7.14 U10.127 | length 7406.9
  Top Layer w8: v1(17389,6531) 17450,6470 17450,6130.57 17596,5984.57 17596,5683 17637,5642 v1(17637,5580) ; v1@17826,4127.48 v1(17826,4130) ; v1@17847.69,4342.69 ccw(c17820.37,4315.37) 17820.37,4354 ccw(c17820.37,4392.63) v1@17847.69,4365.31 ; v1(17859,4354) 17792.63,4354 17760.63,4386 17721,4386 17698.91,4408.09 U7.14@17698.91,4624 17698.91,4718.09 17683,4734 17683,4836 17781,4934 17781,5144 17818,5181 17926,5181 17935,5190 17935,5280.79 18000,5345.79 U6.3@18000,5450 18000,5474 18005,5474 18005,5571 v1(18000,5576) ; U6.3@17993.08,5421.43 cw(c17976.39,5404.73) 18000,5404.73 cw(c18023.61,5404.73) U6.3@18006.92,5421.43 ; C34.2@18224.36,4100.31 cw(c18219.96,4086.97) 18234,4086.97 cw(c18249.76,4086.97) C34.2@18243.25,4101.33 ; C34.2@18225.07,4097.55 ccw(c18210.47,4116) C34.2@18234,4116 ; v1(18235,4085) 18235,4086 18234,4087 C34.2@18234,4116 ; C34.2@18243.6,4098.49 cw(c18254.76,4116) C34.2@18234,4116 ; v1(18340,4062) 18463,4062 18494,4093 18494,4719 18411,4802 18411,4837.01 18425.64,4851.65 U10.127@18470.79,4851.65 ; 18421.74,4847.75 cw(c18431.5,4837.99) U10.127@18433.45,4851.65
  Top Layer w20: S6.2@17739.41,4127.48 17826,4127.48 S6.2@18015,4127.48 18230.02,4127.48 C34.2@18232.5,4125 18232.5,4237.5 R25.2@18225,4245 ; 17795.77,4127.48 ccw(c17795.77,4160.23) v1@17818.93,4137.07 ; v1@17833.07,4137.07 ccw(c17856.23,4160.23) 17856.23,4127.48 ; R25.2@18210.86,4230.86 cw(c18158.61,4178.61) 18232.5,4178.61 ; C34.2@18218.36,4139.14 ccw(c18184.22,4173.28) 18232.5,4173.28 ccw(c18280.78,4173.28) C34.2@18246.64,4139.14 ; 18232.5,4214.82 cw(c18255.18,4214.82) R25.2@18239.14,4230.86
  Bottom Layer w8: P1.15@16015,5902 16143,5902 16199,5958 16199,6529 16267.5,6597.5 17322.5,6597.5 v1(17389,6531) ; v1(17637,5580) 17641,5576 v1(18000,5576) ; v1(17826,4130) 17859,4163 v1(17859,4354) ; v1(18235,4085) 18258,4062 v1(18340,4062)
RTS: J2.8 U2.7 | length 1114.5
  Top Layer w20: J2.8@17819.53,6307.89 17819.53,6389.53 17844,6414 18428,6414 18460,6382 18460,6241 18476,6225 18606,6225 18625,6244 U2.7@18625,6292.52
RXD: J2.3 U2.13 | length 1310.7
  Top Layer w8: v1@18763.69,6061.31 ccw(c18738.79,6086.21) U2.13@18774,6086.21 ; U2.13@18769.48,6076.37 cw(c18758.56,6065.45) v1@18774,6065.45 ; v1@18774,6060.62 cw(c18796.27,6060.62) U2.13@18780.52,6076.37 ; U2.13@18774,6071.73 ccw(c18796.73,6071.73) v1@18780.66,6055.66 ; U2.13@18774,6091.04 ccw(c18816.04,6091.04) v1@18786.31,6061.31 ; v1(18775,6050) 18774,6051 18774,6106.48 U2.13@18775,6107.48
  Bottom Layer w20: J2.3@17765,6196.08 17765,6135 17788,6112 18431,6112 18493,6050 v1(18775,6050) ; v1@18767.93,6042.93 ccw(c18750.86,6025.86) 18750.86,6050 ccw(c18750.86,6074.14) v1@18767.93,6057.07
SSD_PWM: CB2.1 U10.51 | length 1192.5
  Top Layer w8: U10.51@19069.21,5119.37 19117,5119.37 19133.5,5102.87 19162.13,5102.87 v1(19203,5062) ; v1@19187,5062 ccw(c19148.37,5062) 19175.69,5089.31 ccw(c19203,5116.63) v1@19203,5078 ; CB2.1@19325,4300 19363,4300 ; CB2.1@19349.02,4291.11 cw(c19363,4284.57) 19363,4300 ; CB2.1@19349.02,4308.89 ccw(c19363,4315.43) 19363,4300 ; v1(19406,4480) 19406,4343 19363,4300
  Bottom Layer w8: v1(19203,5062) 19203,4979 19226,4956 19226,4891.84 19201,4866.84 19201,4829 19208,4822 19208,4699.57 19406,4501.57 ; v1@19401.36,4495.31 ccw(c19399.46,4501.57) 19406,4501.57 ; v1(19406,4480) 19406,4501.57 ; v1@19410.64,4495.31 cw(c19412.54,4501.57) 19406,4501.57
TXD: J2.2 U2.14 | length 1404.6
  Top Layer w20: J2.2@17641.21,6172.86 cw(c17624.2,6146.06) 17655.94,6146.06 ; J2.2@17655.94,6196.08 17655.94,6146.06 ; J2.2@17670.68,6172.86 ccw(c17687.69,6146.06) 17655.94,6146.06 ; U2.14@18825,6107.48 18825,6179 18810,6194 18392,6194 18315,6117 17685,6117 17655.94,6146.06
VCC: C2.1 C4.1 C47.1 POWER1.1 VR1.3 VR4.3 | length 3558.6
  Top Layer w8: POWER1.1@16335.74,3724.58 ccw(c16324.34,3743) POWER1.1@16346,3743 ; POWER1.1@16346,3708 POWER1.1@16346,3743 ; POWER1.1@16356.26,3724.58 cw(c16367.66,3743) POWER1.1@16346,3743
  Top Layer w30: POWER1.1@16346,3743 16348,3741 16593,3741 16671,3819 v4(17011,3819) ; C2.1@16350,4097.05 16563.05,4097.05 16639.45,4173.45 VR1.3@16639.45,4271.2 ; C2.1@16364.45,4082.6 cw(c16399.33,4047.72) 16399.33,4097.05 cw(c16399.33,4146.38) C2.1@16364.45,4111.5
  Top Layer w50: POWER1.1@16346,3743 POWER1.1@16346,3778 16346,4093.05 C2.1@16350,4097.05
  Bottom Layer w30: v4(17011,3819) 17011,3858.7 17050.3,3898 17270,3898 17401,3767 18343,3767 18535,3575 C47.1@18575,3575
  Bottom Layer w50: C4.1@16225,3757.5 16336.5,3757.5 POWER1.1@16345,3766 ; POWER1.1@16300.13,3757.5 ccw(c16300.13,3823.87) POWER1.1@16347.06,3776.94
  other v1: 18590,3543 18589,3574
VDDA: C35.2 C36.2 L1.2 L2.1 U7.22 | length 1900.3
  Top Layer w8: U7.22@17856.39,4624 17856.39,4489.61 v1@17895,4451 ; v1@17880,4450 ccw(c17841.37,4450) 17868.69,4477.31 ccw(c17896,4504.63) v1@17896,4466 ; v1@17895,4449 v1@17895,4451 ; v1(17896,4450) v1@17895,4451
  Bottom Layer w8: v1@17895,4449 v1(17896,4450) 18134.27,4450 18225.94,4358.33 18584.67,4358.33 L1.2@18595,4348 ; v1@17907.31,4438.69 cw(c17934.63,4411.37) 17934.63,4450 cw(c17934.63,4488.63) v1@17907.31,4461.31 ; 18507.3,4358.33 cw(c18507.3,4260.3) L1.2@18576.62,4329.62 ; 18526.62,4358.33 cw(c18526.62,4279.61) L1.2@18582.27,4335.27 ; 18545.93,4358.33 cw(c18545.93,4298.93) L1.2@18587.93,4340.93 ; 18557.16,4358.33 ccw(c18557.16,4385.84) L1.2@18576.62,4366.38 ; L1.2@18565.24,4358.33 cw(c18565.24,4318.24) L1.2@18593.59,4346.59 ; L1.2@18587.33,4358.33 18589,4360 L1.2@18589,4348
  Bottom Layer w20: L1.2@18580.86,4333.86 cw(c18546.72,4299.72) 18595,4299.72 cw(c18643.28,4299.72) L1.2@18609.14,4333.86 ; L2.1@18581.86,4283.14 ccw(c18550.13,4314.87) 18595,4314.87 ; L1.2@18595,4319.7 ccw(c18646.7,4319.7) L2.1@18610.14,4283.14 ; L1.2@18595,4348 18595,4281 18598,4284 C36.2@18696,4284 ; L2.1@18596,4269 cw(c18632.21,4232.79) v1@18632.21,4284 ; L2.1@18610.14,4254.86 cw(c18680.5,4184.5) C36.2@18680.5,4284 ; v1@18640.93,4276.93 ccw(c18623.86,4259.86) 18623.86,4284 ccw(c18623.86,4308.14) v1@18640.93,4291.07 ; v1@18655.07,4276.93 cw(c18672.14,4259.86) 18672.14,4284 cw(c18672.14,4308.14) v1@18655.07,4291.07 ; C36.2@18681.86,4269.86 ccw(c18647.72,4235.72) 18647.72,4284 ccw(c18647.72,4332.28) C36.2@18681.86,4298.14
  other v1: 18648,4284
VLED+: C1.1 D3.2 D10.2 J5.2 | length 1358.2
  Top Layer w8: D10.2@19399.6,6200.1 19445,6200.1 19470.1,6175 ; D10.2@19410.89,6197.06 cw(c19427.85,6161.34) 19455.8,6189.3 ; D10.2@19414.32,6189.83 cw(c19433.01,6150.47) 19463.82,6181.28 ; D10.2@19417.75,6182.6 cw(c19438.17,6139.6) 19471.84,6173.26 ; C1.1@19476.67,6169.85 ccw(c19470.1,6168.24) 19470.1,6175 ; C1.1@19476.67,6180.15 cw(c19470.1,6181.76) 19470.1,6175 ; J5.2@19495,5300.31 19540.31,5300.31 19554,5314 19554,5345 19538,5361 19538,5873.4 19599.6,5935 19599.6,6144 19568.6,6175 ; C1.1@19557.12,6167.16 cw(c19568.6,6162.68) 19568.6,6175 ; C1.1@19557.12,6182.84 ccw(c19568.6,6187.32) 19568.6,6175 ; 19470.1,6175 C1.1@19517.32,6175 19568.6,6175
VLED-: J5.1 R40.2 R41.2 | length 305.1
  Top Layer w8: v1@19483.69,5358.69 cw(c19456.37,5331.37) 19495,5331.37 cw(c19533.63,5331.37) v1@19506.31,5358.69 ; J5.1@19495,5320 v1(19495,5370)
  Bottom Layer w8: v1(19495,5370) 19557,5370 R40.2@19575,5352 R41.2@19575,5245
VREF+: C37.2 C38.2 C39.2 L2.2 U7.21 | length 1770.5
  Top Layer w8: U7.21@17836.7,4624 17836.7,4664.74 17846.96,4675 17924.87,4675 17932,4667.87 17932,4588 17990,4530 17990,4479.64 18071,4398.64 18071,4368 v1(18102,4337) ; v1@18086,4337 ccw(c18047.37,4337) 18074.69,4364.31 ccw(c18102,4391.63) v1@18102,4353
  Bottom Layer w8: v1@18102,4328 v1(18102,4337)
  Bottom Layer w20: v1@18102,4327 cw(c18102,4302.86) 18119.07,4319.93 cw(c18136.14,4337) v1@18112,4337 ; v1(18102,4337) C39.2@18170,4269 ; v1@18105.49,4333.51 cw(c18055.99,4284) C39.2@18126,4284 ; C39.2@18127.22,4311.78 ccw(c18146,4330.56) C39.2@18146,4304 ; C39.2@18146,4284 ccw(c18182.21,4320.21) 18182.21,4269 ; C39.2@18160.14,4298.14 ccw(c18230.5,4368.5) C38.2@18230.5,4269 ; 18213.43,4269 ccw(c18213.43,4311.86) C38.2@18246,4284 ccw(c18282.21,4320.21) 18282.21,4269 ; C38.2@18230.8,4297 cw(c18170,4349.01) C39.2@18170,4269 ; C38.2@18260.14,4298.14 ccw(c18330.5,4368.5) C37.2@18330.5,4269 ; C38.2@18261.5,4269 ccw(c18261.5,4368.5) C37.2@18331.86,4298.14 ; 18309.79,4269 ccw(c18309.79,4320.21) C37.2@18346,4284 ccw(c18382.21,4320.21) 18382.21,4269 ; C37.2@18360.14,4298.14 ccw(c18430.5,4368.5) 18430.5,4269 ; L2.2@18446.86,4254.86 ccw(c18412.72,4220.72) 18412.72,4269 ccw(c18412.72,4317.28) L2.2@18446.86,4283.14 ; L2.2@18461,4269 C39.2@18170,4269